# Altium PCB Revision-1.PcbDoc
Units mil, origin at the board's own origin, x right, y up, seen from the top; angles counter-clockwise.
Board outline 3513.78 x 1830.71 mil, 2 copper layers (Top Layer, Bottom Layer); 68 components, 46 nets, 254 pads, 43 vias.
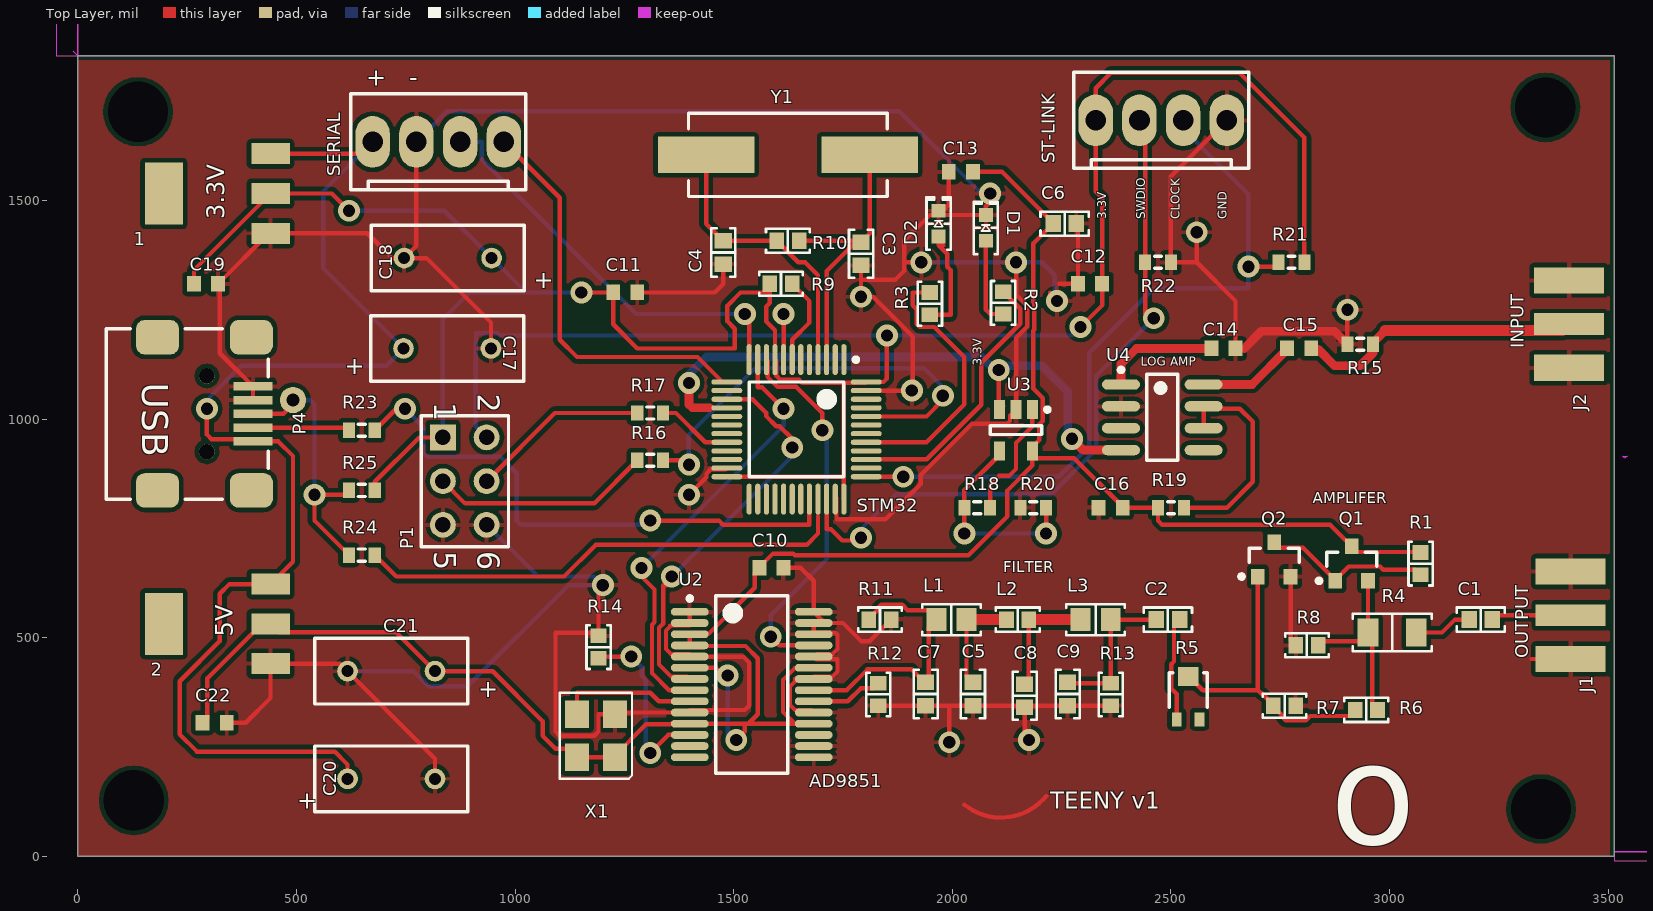
[diagram p0: Top Layer view]
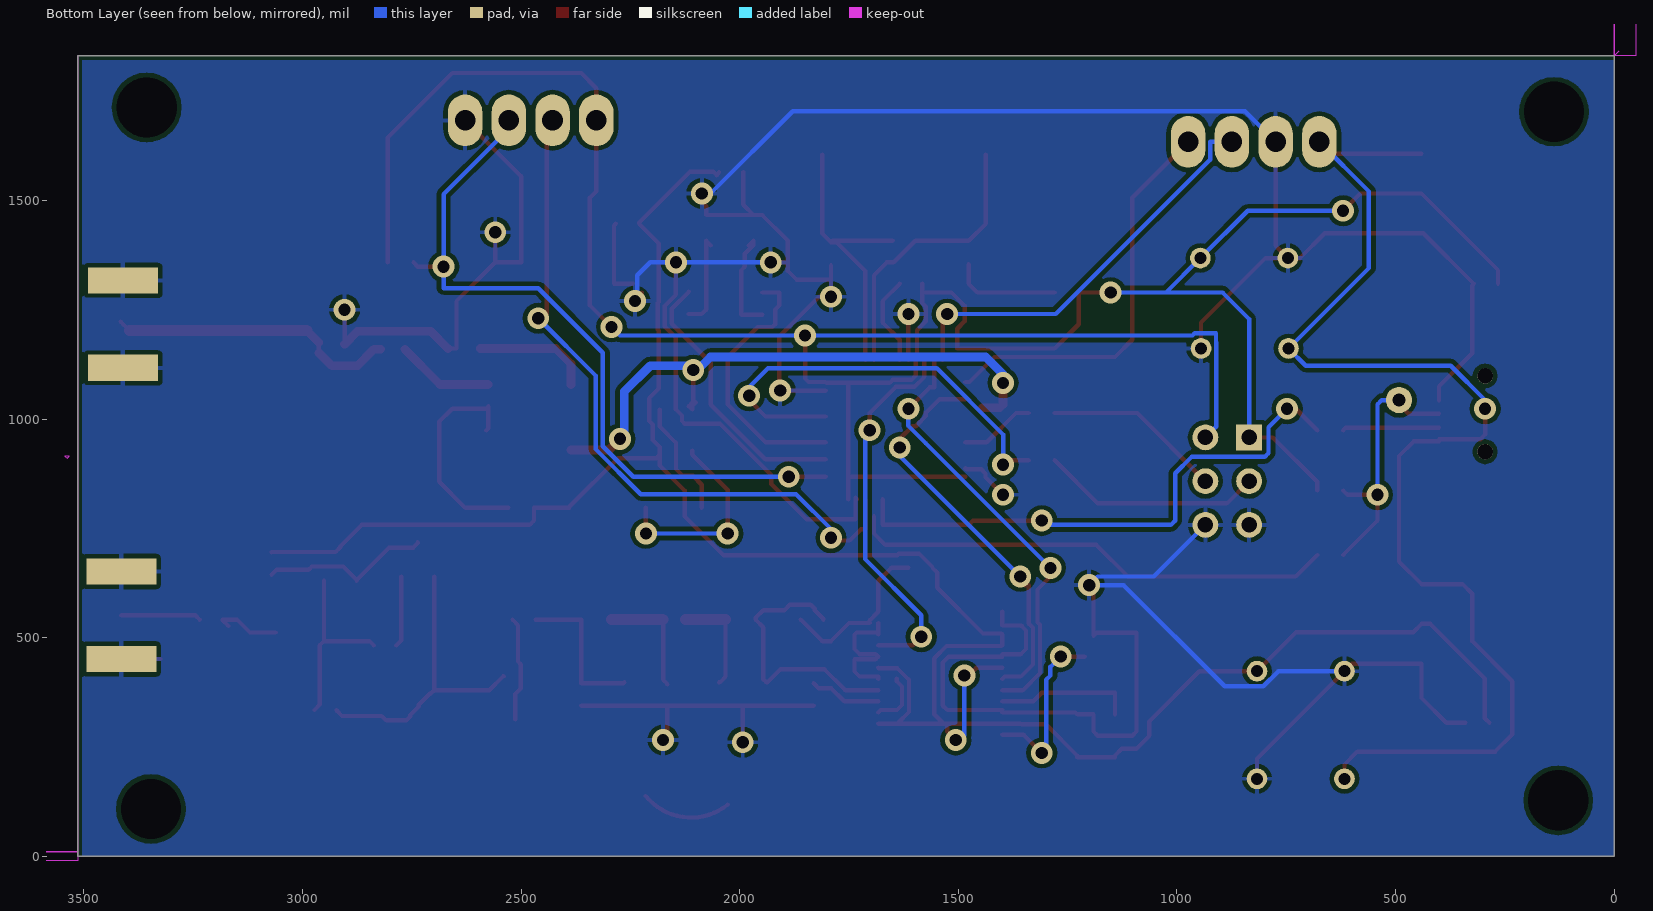
[diagram p1: Bottom Layer view, seen from below]

## Layer stack, top to bottom
Top Solder: solder mask 0.4, Solder Resist, Dk 3.5
Top Layer: signal copper 1.4
Dielectric 1: dielectric 12.6, FR-4, Dk 4.8
Bottom Layer: signal copper 1.4
Bottom Solder: solder mask 0.4, Solder Resist, Dk 3.5

## Board outline
0,0 0,816.93 0,1210.63 0,1830.71 3513.78,1830.71 3513.78,0
cut-out: 0,1830.71 0,3996.06 -49.21,3996.06 -49.21,1830.71
cut-out: 3513.78,-9.84 5984.25,-9.84 5994.09,0 5994.09,9.84 3513.78,9.84
cut-out: 0,1830.71 3513.78,1830.71 3513.78,9.84 5994.09,9.84 5994.09,4005.91 0,4005.91 0,1830.71 -9.84,1840.55
cut-out: 3533.46,915.35 3543.31,915.35 3538.39,910.43

## Design rules (kind name [scope] priority, off if disabled: settings)
Clearance [All] p1: gap=10 ignorepadtopadclearanceinfootprint=TRUE except(0: Arc-Hole Track-Hole SMDPad-Hole THPad-Hole Via-Hole Fill-Hole Poly-Hole Region-Hole Text-Hole; 6: Arc-Arc Arc-Track Arc-SMDPad Arc-THPad Track-Track Track-SMDPad Track-THPad SMDPad-SMDPad SMDPad-THPad; 7: Arc-Via Track-Via)
PolygonConnect [All] p1: connectstyle=Relief reliefconductorwidth=10 reliefentries=4 polygonreliefangle="90 Angle" airgapwidth=10
RoutingVias [All] p1: holewidth=28 width=50 viastyle="Through Hole" minholewidth=28 minwidth=50 maxholewidth=28 maxwidth=50
SolderMaskExpansion [All] p1 off: expansion=4
Width [All] p1: maxlimit=30 minlimit=10 preferedwidth=10
30 further rules are at their usual default settings.

## Classes and differential pairs
component class Sheet1: C1 C2 C3 C4 C5 C6 C7 C8 C9 C10 C11 C12 C13 C14 C15 C16 D1 D2 L1 L2 L3 LED Q1 Q2 R1 R2 R3 R4 R5 R6 R7 R8 R9 R10 R11 R12 R13 R14 R15 R16 R17 R18 R19 R20 STM32 U2 U3 U4 X1 Y1
component class Power: 1 2 C17 C18 C19 C20 C21 C22 J1 J2 P4 R21 R22 R23 R24 R25 SERIAL ST-LINK

## Components (designator, comment, footprint, x,y, rotation, side; value= is the part's Value field where it differs from the comment)
1 "AMS1117-3.3" SOT223 318.86,1515.75 r180 top
2 "AMS1117-5.0" SOT223 318.86,531.5 r180 top
C1 "Cap Semi" "CAP 0603/1608" 3208.66,541.34 r0 top value=10uF
C2 "Cap Semi" "CAP 0603/1608" 2493.11,541.34 r180 top value=10uF
C3 "Cap Semi" "CAP 0603/1608" 1791.34,1377.95 r270 top value=22pF
C4 "Cap Semi" "CAP 0603/1608" 1476.38,1380.9 r270 top value=22pF
C5 "Cap Semi" "CAP 0603/1608" 2047.24,371.06 r90 top value=81pF
C6 "Cap Semi" "CAP 0603/1608" 2256.89,1446.85 r180 top value=100nF
C7 "Cap Semi" "CAP 0603/1608" 1938.98,371.06 r90 top value=20pF
C8 "Cap Semi" "CAP 0603/1608" 2165.35,367.12 r90 top value=81pF
C9 "Cap Semi" "CAP 0603/1608" 2263.78,371.06 r90 top value=20pF
C10 "Cap Semi" 1608[0603] 1586.61,659.45 r180 top value=100nF
C11 "Cap Semi" 1608[0603] 1251.97,1289.37 r180 top value=100nF
C12 "Cap Semi" 1608[0603] 2314.96,1309.05 r0 top value=100nF
C13 "Cap Semi" 1608[0603] 2019.68,1564.96 r0 top value=100nF
C14 "Cap Semi" 1608[0603] 2620.08,1161.42 r0 top value=10uF
C15 "Cap Semi" 1608[0603] 2793.31,1161.42 r0 top value=10uF
C16 "Cap Semi" 1608[0603] 2362.2,797.24 r0 top value=100pF
C17 "Cap Pol1" RAD-0.2 844.88,1161.42 r0 top value=10uF
C18 "Cap Pol1" RAD-0.2 846.46,1368.11 r180 top value=10uF
C19 "Cap Semi" 1608[0603] 293.31,1309.05 r180 top value=100nF
C20 "Cap Pol1" RAD-0.2 716.93,177.17 r0 top value=10uF
C21 "Cap Pol1" RAD-0.2 716.93,423.23 r180 top value=10uF
C22 "Cap Semi" 1608[0603] 312.99,305.12 r180 top value=100nF
D1 "RED" "LED 0603/1608 RED" 2076.77,1437.01 r90 top
D2 "GREEN" "LED 0603/1608 GREEN" 1968.5,1446.85 r90 top
J1 "1865" ADAFRUIT_1865_1865(Primary) 3494.09,551.18 r180 top
J2 "1865" ADAFRUIT_1865_1865(Primary) 3490.35,1217.05 r180 top
L1 "Inductor" "RES 0805/2012" 1998.03,541.34 r0 top value=150nH
L2 "Inductor" "RES 0603/1608" 2149.61,541.34 r0 top value=120nH
L3 "Inductor" "RES 0805/2012" 2327.76,541.34 r0 top value=150nH
P1 "Header 3X2" HDR2X3 835.04,957.87 r270 top
P4 "USB" "FCI USB 10033526-N3212LF" 249.96,1011.81 r90 top
Q1 "MMBT3904LT1G" ONSC-SOT-23-3-318-08_V 2913.39,669.29 r90 top
Q2 "MMBT3904LT1G" ONSC-SOT-23-3-318-08_V 2736.22,679.13 r90 top
R1 "Res3" "RES 0603/1608" 3070.87,669.29 r90 top value=220
R2 "Res3" "RES 0603/1608" 2116.14,1265.75 r90 top value=220
R3 "Res3" "RES 0603/1608" 1948.82,1263.78 r90 top value=220
R4 "Res3" "RES 1206/3216" 3005.91,511.81 r180 top value=4.7K
R5 "Res Adj2" "POT BOURNS TRIMPOT 3302" 2539.37,364.17 r0 top value=1K
R6 "Res3" "RES 0603/1608" 2946.85,334.65 r180 top value=220
R7 "Res3" "RES 0603/1608" 2759.84,344.49 r180 top value=100
R8 "Res3" "RES 0603/1608" 2811.02,482.28 r0 top value=220
R9 "Res3" "RES 0603/1608" 1608.27,1309.06 r0 top value=10K
R10 "Res3" "RES 0603/1608" 1624.02,1407.48 r0 top value=1M
R11 "Res3" "RES 0603/1608" 1834.65,541.34 r180 top value=100
R12 "Res3" "RES 0603/1608" 1830.71,370.08 r90 top value=51
R13 "Res3" "RES 0603/1608" 2362.2,370.08 r90 top value=100
R14 "Res3" "RES 0603/1608" 1190.95,478.35 r270 top value=3.9K
R15 "Res3" J1-0603 2933.07,1171.26 r0 top value=51
R16 "Res3" J1-0603 1309.06,905.51 r0 top value=10K
R17 "Res3" J1-0603 1309.06,1013.78 r180 top value=10K
R18 "Res3" J1-0603 2057.09,797.25 r180 top value=1K
R19 "Res3" J1-0603 2500,797.24 r0 top value=4.7
R20 "Res3" J1-0603 2185.04,797.24 r180 top value=1K
R21 "Res3" J1-0603 2775.59,1358.27 r0 top value=10K
R22 "Res3" J1-0603 2470.47,1358.27 r180 top value=10K
R23 "Res3" J1-0603 649.61,974.41 r0 top value=22
R24 "Res3" J1-0603 649.61,688.98 r0 top value=22
R25 "Res3" J1-0603 649.61,836.61 r0 top value=1.5K
SERIAL "BACKUP" "MOLEX KK 0022272041" 824.41,1633.86 r0 top (schematic designator P2)
ST-LINK "ST-Link" "MOLEX KK 0022272041" 2477.95,1683.07 r0 top (schematic designator P3)
STM32 "STM32F103C8T6" STM-LQFP48_N 1643.7,976.38 r270 top (schematic designator U1)
U2 "AD9851BRSRL" ADI-RS-28_M 1541.34,392.72 r0 top
U3 "LM7301IM5" MF05A_N 2145.67,974.41 r270 top
U4 "AD8307ARZ" ADI-R-8_N 2480.32,1003.94 r0 top
X1 "KC5032A30" KC5032A30 1185.04,275.59 r90 top
Y1 "XTAL" "ABRACON ABLS" 1624.02,1604.33 r0 top

## Footprints (in the part's own frame and the unit in brackets; to place one, negate y for a bottom-side part, rotate by r counter-clockwise, add the part's x,y. Pads: shape width x height; smd on the part's side, far side on the other; paste and mask are expansions set on the pad)
1608[0603] [mm] "Chip Capacitor, Body 1.6x0.8mm, IPC High Density"
  rect 0.8x0.9 smd: 1(-0.7,0) 2(0.7,0)
  body extent -0.87,-0.48 0.87,0.48, height 1.3
"ABRACON ABLS" [mm] "Crystal, 2-Leads, Body 4.70x11.40mm, Pitch 8.80mm, IPC Medium Density"
  rect 5.6x2.1 smd: 1(-4.75,0) 2(4.75,0)
  silkscreen extent -5.77,-2.43 5.77,2.43, body extent -6.35,-2.35 6.35,2.35, height 4.2
ADAFRUIT_1865_1865(Primary) [mil]
  rect 160x60 smd: GND1(80,100) GND4(80,-100)
  rect 160x60 smd far side: GND2(80,100) GND3(80,-100)
  rect 160x50 smd: P(80,0)
ADI-R-8_N [mm] "SOIC, 8-Leads, Body 4.9x3.9mm, Pitch 1.27mm, IPC Medium Density"
  oval 2.2x0.6 smd: 1(-2.4,1.905) 2(-2.4,0.635) 3(-2.4,-0.635) 4(-2.4,-1.905) 5(2.4,-1.905) 6(2.4,-0.635) 7(2.4,0.635) 8(2.4,1.905)
  silkscreen extent -2.52,-2.5 0.9,2.88, body extent -2,-2.5 2,2.5, height 1.75
ADI-RS-28_M [mm] "SOP, 28-Leads, Body 10.2x5.3mm, Pitch 0.65mm, IPC Low Density"
  oval 2.2x0.45 smd: 1(-3.6,4.225) 2(-3.6,3.575) 3(-3.6,2.925) 4(-3.6,2.275) 5(-3.6,1.625) 6(-3.6,0.975) 7(-3.6,0.325) 8(-3.6,-0.325) 9(-3.6,-0.975) 10(-3.6,-1.625) 11(-3.6,-2.275) 12(-3.6,-2.925) 13(-3.6,-3.575) 14(-3.6,-4.225) 15(3.6,-4.225) 16(3.6,-3.575) 17(3.6,-2.925) 18(3.6,-2.275) 19(3.6,-1.625) 20(3.6,-0.975) 21(3.6,-0.325) 22(3.6,0.325) 23(3.6,0.975) 24(3.6,1.625) 25(3.6,2.275) 26(3.6,2.925) 27(3.6,3.575) 28(3.6,4.225)
  silkscreen extent -3.72,-5.15 2.1,5.15, body extent -2.69,-5.17 2.69,5.17, height 1.98
"CAP 0603/1608" [mm] "Chip Capacitor, 2-Leads, Body 1.60x0.80mm, IPC Medium Density"
  rect 0.9x1 smd: 1(-0.675,0) 2(0.675,0)
  silkscreen extent -1.4,-0.7 1.4,0.7, body extent -0.8,-0.41 0.8,0.41, height 0.82
"FCI USB 10033526-N3212LF" [mm] "USB 2.0 Type B Mini"
  rect 0.5x2.25 smd: 1(1.6,-3.826) 2(0.8,-3.826) 3(0,-3.826) 4(-0.8,-3.826) 5(-1.6,-3.826)
  round 0.9 hole 0.9 unplated: M(-2.2,-1.151) M(2.2,-1.151)
  rrect50% 2x2.5 smd: S(-4.45,-3.731) S(-4.45,1.719) S(4.45,-3.731) S(4.45,1.719)
  silkscreen extent -4.95,-4.71 4.95,4.69, body extent -4.95,-4.7 4.95,4.7, height 4.01
HDR2X3 [mm] "Connector; Header; 3x2 Position"
  rect 1.5x1.5 hole 0.9: 1(0,0)
  round 1.5 hole 0.9: 2(0,2.54) 3(2.54,0) 4(2.54,2.54) 5(5.08,0) 6(5.08,2.54)
  silkscreen extent -1.27,-1.27 6.35,3.81
J1-0603 [mm] "Chip Resistor, Body 1.6x0.8mm, IPC High Density"
  rect 0.7x0.9 smd: 1(-0.75,0) 2(0.75,0)
  silkscreen extent -0.2,-0.35 0.2,0.35, body extent -0.85,-0.48 0.85,0.48, height 0.9
KC5032A30 [mm] "Standard Clock Oscillators 30.0000MHZ"
  rect 1.6x1.4 smd: 1(-1.25,-1.1) 2(1.25,-1.1) 3(1.25,1.1) 4(-1.25,1.1)
  silkscreen extent -2.5,-2.1 2.5,2.1
"LED 0603/1608 GREEN" [mm] "Chip Diode, 2-Leads, Body 1.60x0.80mm, IPC Medium Density"
  rect 0.8x0.8 smd: 1(-0.75,0) 2(0.75,0)
  silkscreen extent -1.52,-0.7 1.52,0.7, body extent -0.8,-0.4 0.8,0.4, height 0.53
"LED 0603/1608 RED" [mm] "Chip Diode, 2-Leads, Body 1.60x0.80mm, IPC Medium Density"
  rect 0.8x0.8 smd: 1(-0.75,0) 2(0.75,0)
  silkscreen extent -1.52,-0.7 1.52,0.7, body extent -0.8,-0.4 0.8,0.4, height 0.53
MF05A_N [mm] "SOT23, 5-Leads, Body 2.9x1.6mm, Pitch 0.95mm, Lead Span 2.8mm, IPC Medium Density"
  rect 1.1x0.65 smd: 1(-1.2,0.95) 2(-1.2,0) 3(-1.2,-0.95) 4(1.2,-0.95) 5(1.2,0.95)
  silkscreen extent -1.32,-1.5 0.25,1.95, body extent -0.83,-1.49 0.83,1.5, height 1.19
"MOLEX KK 0022272041" [mm]
  oval 2x3 hole 1.2: 1(-3.81,0) 2(-1.27,0) 3(1.27,0) 4(3.81,0)
  silkscreen extent -5.08,-2.79 5.08,2.79, body extent -5.08,-2.9 5.08,2.9, height 11.7
ONSC-SOT-23-3-318-08_V [mm] "SOT23, 3-Leads, Body 2.92x1.3mm, Pitch 0.95mm"
  rect 0.9x0.8 smd: 1(-1,0.95) 2(-1,-0.95) 3(1,0)
  silkscreen extent -1.12,-1.46 0.65,2.02, body extent -0.65,-1.46 0.65,1.46, height 1.11
"POT BOURNS TRIMPOT 3302" [mm] "Bourns Trimpot 3302 - Open Frame 2.75mm x 2.20mm x 1.05mm"
  rect 0.575x0.8 smd: 1(-0.663,-1.3) 3(0.663,-1.3)
  rect 1.2x1.1 smd: 2(0,1.2)
  silkscreen extent -1.1,-0.6 1.1,1.4, body extent -1.1,-1.3 1.1,1.45, height 0.81
RAD-0.2 [mm] "Radial Cap, Thru-Hole; 2 Leads; 0.2 in Pin Spacing"
  round 1.2 hole 0.7: 1(-2.54,0) 2(2.54,0)
  silkscreen extent -4.45,-1.91 4.44,1.9
"RES 0603/1608" [mm] "Chip Resistor, 2-Leads, Body 1.60x0.80mm, IPC Medium Density"
  rect 0.85x0.95 smd: 1(-0.65,0) 2(0.65,0)
  silkscreen extent -1.27,-0.7 1.27,0.7, body extent -0.8,-0.4 0.8,0.4, height 0.45
"RES 0805/2012" [mm] "Chip Resistor, 2-Leads, Body 2.00x1.25mm, IPC Medium Density"
  rect 1.15x1.35 smd: 1(-0.875,0) 2(0.875,0)
  silkscreen extent -1.7,-0.9 1.7,0.9, body extent -0.95,-0.62 1.05,0.63, height 0.6
"RES 1206/3216" [mm] "Chip Resistor, 2-Leads, Body 3.13x1.55mm, IPC Medium Density"
  rect 1.2x1.65 smd: 1(-1.4,0) 2(1.4,0)
  silkscreen extent -2.3,-1.1 2.3,1.1, body extent -1.57,-0.8 1.62,0.8, height 0.6
SOT223 [mil]
  rect 88x48 smd: 1(-122,91) 2(-122,0) 3(-122,-91)
  rect 86.61x141.73 smd: 4(122.01,0)
STM-LQFP48_N [mm] "QFP, 48-Leads, Body 7x7mm, Pitch 0.5mm, IPC Medium Density"
  oval 1.8x0.3 smd: 1(-4.05,2.75) 2(-4.05,2.25) 3(-4.05,1.75) 4(-4.05,1.25) 5(-4.05,0.75) 6(-4.05,0.25) 7(-4.05,-0.25) 8(-4.05,-0.75) 9(-4.05,-1.25) 10(-4.05,-1.75) 11(-4.05,-2.25) 12(-4.05,-2.75) 25(4.05,-2.75) 26(4.05,-2.25) 27(4.05,-1.75) 28(4.05,-1.25) 29(4.05,-0.75) 30(4.05,-0.25) 31(4.05,0.25) 32(4.05,0.75) 33(4.05,1.25) 34(4.05,1.75) 35(4.05,2.25) 36(4.05,2.75)
  oval 0.3x1.8 smd: 13(-2.75,-4.05) 14(-2.25,-4.05) 15(-1.75,-4.05) 16(-1.25,-4.05) 17(-0.75,-4.05) 18(-0.25,-4.05) 19(0.25,-4.05) 20(0.75,-4.05) 21(1.25,-4.05) 22(1.75,-4.05) 23(2.25,-4.05) 24(2.75,-4.05) 37(2.75,4.05) 38(2.25,4.05) 39(1.75,4.05) 40(1.25,4.05) 41(0.75,4.05) 42(0.25,4.05) 43(-0.25,4.05) 44(-0.75,4.05) 45(-1.25,4.05) 46(-1.75,4.05) 47(-2.25,4.05) 48(-2.75,4.05)
  silkscreen extent -4.17,-2.75 2.75,3.58, body extent -3.5,-3.5 3.5,3.5, height 1.6

## Part data
1: library part AMS1117-5.0, "Sot-223", Package="SOT-223 ams", Availability=Unavailable, MF=ams, MP=AMS1117-5.0, Price="0.10 USD"
2: "Sot-223", Package="SOT-223 ams", Availability=Unavailable, MF=ams, MP=AMS1117-5.0, Price="0.10 USD"
C1 C2 C3 C4 C5 C6 C7 C8 C9 C10 C11 C12 C13 C14 C15 C16 C19 C22: "Capacitor (Semiconductor SIM Model)", LatestRevisionDate=29-May-2009, LatestRevisionNote="IPC-7351 Footprint Added.", PackageDescription="Chip Capacitor", PackageReference=C1206, Published=8-Jun-2000, Publisher="Altium Limited"
C17 C18 C20 C21: "Polarized Capacitor (Radial)", LatestRevisionDate=17-Jul-2002, LatestRevisionNote="Re-released for DXP Platform.", PackageDescription="Polarized Capacitor (Radial); 2 Leads", PackageReference=RB7.6-15, Published=8-Jun-2000, Publisher="Altium Limited"
D1 D2: library part LED3, "Typical BLUE SiC LED", DatasheetVersion=16-Apr-2002, LatestRevisionDate=17-Dec-2003, LatestRevisionNote="PCB Footprint replaced.", PackageDescription="SM LED; 2 C-Bend Leads; Body 3.5 x 2.8 x 1.9 mm, inc leads (LxWxH typ)", PackageReference=3.5X2.8X1.9, PackageVersion=16-Apr-2002, Published=8-Jun-2000, Publisher="Altium Limited"
J1 J2: "ROUND STANDOFF 4-40 BRASS 5/8", Package=None, Availability=Bad, MF=Keystone, MP=1865, Price="2.41 USD"
P1: "Header, 3-Pin, Dual row", LatestRevisionDate=17-Jul-2002, LatestRevisionNote="Re-released for DXP Platform.", Publisher="Altium Limited"
P4: library part "Header 5", "Header, 5-Pin", LatestRevisionDate=17-Jul-2002, LatestRevisionNote="Re-released for DXP Platform.", Publisher="Altium Limited"
Q1 Q2: "General Purpose Transistor, NPN Silicon, 3-Pin SOT-23, Pb-Free, Tape and Reel", Manufacturer="On Semiconductor", Supplier Part Number 1=MMBT3904LT1GOSTR-ND, Supplier Part Number 10=863-MMBT3904LT1G, ComponentLink1Description="Manufacturer URL", ComponentLink1URL=http://www.onsemi.com/, ComponentLink2Description=Datasheet, ComponentLink2URL=http://www.onsemi.cn/pub_link/Collateral/MMBT3904LT1-D.PDF, ComponentLink3Description="Package Specification", ComponentLink3URL=http://www.onsemi.cn/pub_link/Collateral/318-08.PDF, DatasheetVersion="Rev. 12", fT Min (MHz)=300, IC Continuous (A)=0.2, Mounting Technology="Surface Mount", PackageDescription="3-Pin Small Outline Transistor, Body 2.92 x 1.3 mm, Pitch 0.95 mm", PackageReference=SOT-23-3-318-08, PackageVersion="Rev. AP, 11/2009", Packing="Tape and Reel", PartNumber=MMBT3904LT1G, Polarity=NPN, RoHS=TRUE, Supplier 1=Digi-Key, Supplier 2=Digi-Key, Supplier 3=Digi-Key, Supplier 4=Farnell, Supplier 5=Farnell, Supplier 6=Farnell, Supplier 7=Newark, Supplier 8=Newark, Supplier 9=Newark, Supplier 10=Mouser, Supplier Part Number 2=MMBT3904LT1GOSCT-ND, Supplier Part Number 3=MMBT3904LT1GOSDKR-ND, Supplier Part Number 4=2317804, Supplier Part Number 5=1459100, Supplier Part Number 6=1459100RL, Supplier Part Number 7=83K0942, Supplier Part Number 8=83H7337, Supplier Part Number 9=28X7922
R1 R2 R3 R4 R6 R7 R8 R9 R10 R11 R12 R13 R14 R15 R16 R17 R18 R19 R20 R21 R22 R23 R24 R25: "Resistor", LatestRevisionDate=29-May-2009, LatestRevisionNote="IPC-7351 Footprint Added.", PackageDescription="Chip Resistor", PackageReference=J1-0603, Published=8-Jun-2000, Publisher="Altium Limited"
R5: "Variable Resistor", LatestRevisionDate=17-Jul-2002, LatestRevisionNote="Re-released for DXP Platform.", PackageDescription="Axial Device, Thru-Hole; 2 Leads; 0.6 in Pin Spacing", PackageReference=AXIAL-0.6, Published=8-Jun-2000, Publisher="Altium Limited", Set Position=0.5
SERIAL ST-LINK: library part "Header 4", "Header, 4-Pin", LatestRevisionDate=17-Jul-2002, LatestRevisionNote="Re-released for DXP Platform.", Publisher="Altium Limited"
STM32: "ARM Cortex-M3 32-bit MCU, 64 KB Flash, 20 KB Internal RAM, 37 I/Os, 48-pin LQFP, -40 to 85 degC, Tray", I/Os (High Current)=37, Operating Frequency(F) (Processor speed) (MHz)=72, Supplier Part Number 1=497-6063-ND, Supply Voltage(Vcc) min (V)=2, A/D Converter="2x12-bit (10 Channel)", ComponentLink1Description="Manufacturer URL", ComponentLink1URL=http://www.st.com/web/en/home.html, ComponentLink2Description=Datasheet, ComponentLink2URL=http://www.st.com/st-web-ui/static/active/en/resource/technical/document/datasheet/CD00161566.pdf, ComponentLink3Description="Package Specification", ComponentLink3URL=http://www.st.com/st-web-ui/static/active/en/resource/technical/document/datasheet/DM00058181.pdf, Core="ARM Cortex-M3", DatasheetVersion="Rev. 16", FLASH Size (Prog) (kB)=64, Internal RAM Size (kB)=20, Mounting Technology="Surface Mount", PackageDescription="48-Pin Low Profile Quad Flat Package, 7 x 7 mm Body, 0.5 mm Pitch", PackageReference=LQFP48, PackageVersion="Rev. 6, 06/2013", Packing=Tray, PartNumber=STM32F103C8T6, Supplier 1=Digi-Key, Supplier 2=Farnell, Supplier 3=Newark, Supplier 4=Newark, Supplier 5=Mouser, Supplier Part Number 2=1447637, Supplier Part Number 3=59M2182, Supplier Part Number 4=57P1222, Supplier Part Number 5=511-STM32F103C8T6
U2: "CMOS 180 MHz DDS/DAC Synthesizer, 10-Bit, Parallel, Serial, RS-28, 1500 Reel,Pb-Free", Code_JEDEC=MO-150-AH, Compliance Range (V)=1.5V, ComponentLink1Description="Manufacturer URL", ComponentLink1URL=www.analog.com, ComponentLink2Description=Datasheet, ComponentLink2URL=http://www.analog.com/static/imported-files/data_sheets/AD9851.pdf, ComponentLink3Description="Package Specification", ComponentLink3URL=http://www.analog.com/static/imported-files/packages/32122249223724RS_28.pdf, DatasheetVersion="Rev. D", FS Iout (mA nom)=20mA, I/O Interface="Parallel, Serial", I Supply total (max)=130mA, Master fclk=180MHz, PackageDescription="28-Lead Shrink Small Outline Package [SSOP]", PackageReference=RS-28, PackageVersion="revA, 1997", REFCLK Multiplier=Yes, Resolution (Bits)=10bit, Tuning Word Width (bits)=32bit
U3: "Low Power, 4 MHz GBW, Rail-to-Rail Input-Output Operational Amplifier, 5-pin SOT-23", Manufacturer="National Semiconductor", PackageTopMarking=A04A*XTT, PowerWise=N, ComponentLink1Description="Manufacturer URL", ComponentLink1URL=http://www.national.com/, ComponentLink2Description="LM7301 Datasheet", ComponentLink2URL=http://www.national.com/ds/LM/LM7301.pdf, ComponentLink3Description="LM7301 Web Page", ComponentLink3URL=http://www.national.com/pf/LM/LM7301.html, ComponentLink4Description="MF05A Package Page", ComponentLink4URL=http://www.national.com/packaging/folders/mf05a.html, CompType=Amplifiers, DatasheetVersion=May-2009, High-Reliability=Y, PackageDescription="Molded SOT-23, .115 x .063 x .040 in Body, 5 Lead, .0375 in Pitch", PackageReference=MF05A, PackageVersion="revD, Aug-2008", PartNumber=LM7301IM5, PinCount=5, RoHS=N
U4: "Low Cost, DC to 500 MHz, 92 dB Logarithmic Amplifier, 400ns Response Time, R-8, Pb-Free, 98 Tube", RF Frequency (MHz)="dc to 500", Supply Current=8mA, Temp Stability (dB)=1dB, Voltage Supply (V)="2.7 to 5.5", Code_JEDEC=MS-012-AA, ComponentLink1Description="Manufacturer URL", ComponentLink1URL=www.analog.com, ComponentLink2Description=Datasheet, ComponentLink2URL=http://www.analog.com/static/imported-files/data_sheets/AD8307.pdf, ComponentLink3Description="Package Specification", ComponentLink3URL=http://www.analog.com/static/imported-files/packages/PKG_PDF/SOIC_Narrow%20(R)/R_8.pdf, DatasheetVersion="Rev. D", Dynamic Range (dB)=92dB, PackageDescription="8-Lead Standard Small Outline Package [SOIC_N]", PackageReference=R-8, PackageVersion=060506-A, Product Description="High Dynamic Range", Response Time (ns typ)=400ns
X1: "Standard Clock Oscillators 30.0000MHZ", Mfr1="AVX / Kyocera", Mfr PN=KC5032A30
Y1: "Crystal Oscillator", LatestRevisionDate=17-Jul-2002, LatestRevisionNote="Re-released for DXP Platform.", PackageDescription="Crystal, Thru-Hole; 2 Leads; Body 3.1 x 8.2 mm (Dia.xH)", PackageReference=R38, Published=8-Jun-2000, Publisher="Altium Limited"
L1 L2 L3: Code_IEC=1005, Code_JEITA=0402, LatestRevisionDate=29-May-2009, LatestRevisionNote="IPC-7351 Footprint Added.", PackageDescription="Chip Inductor", PackageReference=0402-A, Published=8-Jun-2000, Publisher="Altium Limited"

## Free pads (board coordinates)
  round 60 hole 30: 3(492.13,1043.31)
  round 60 hole 137.8 unplated: 4(127.95,127.95)
  round 60 hole 137.8: 5(137.8,1702.76) 6(3346.46,108.27) 7(3356.3,1712.6)

## Via types
v1: diameter 50, hole 28, Top Layer to Bottom Layer, tented both sides, 43 vias

## Nets (pads, with @x,y where several pads share a name; then routed paths per layer and width w, separated by ;. In a path a pad name is that pad's centre, name@x,y a point inside that pad or via, vN(x,y) a via of type N, cw(c..) or ccw(c..) an arc to the next point about the centre after c; other vN are vias at no path point)
3.3V: 1.2 C11.2 C12.2 C18.1 C19.2 P1.1 P1.2 R9.1 R21.2 R25.2 ST-LINK.1 STM32.9 STM32.24 STM32.36 STM32.48 | length 6610.7
  Top Layer w10: C19.2 265.75,1340.64 1.2 580.71,1515.75 v1(620.08,1476.38) ; R25.2 679.13,856.3 780.71,957.87 P1.1 ; v1@1161.42,1289.37 C11.2 1224.41,1216.54 1279.53,1161.42 1502.69,1161.42 1502.69,1206.48 1485.59,1223.59 1485.59,1259.21 1515.75,1289.37 1582.68,1289.37 ; STM32.24 1750,868.11 1751.97,866.14 ; R9.1 1582.68,1289.37 ; STM32.36 1751.97,866.14 ; v1(1850.39,1190.94) 1850.39,1092.52 1842.52,1084.64 STM32.48 1801.18,1082.68 1751.97,1082.68 ; v1(2293.31,1210.63) 2342.52,1259.84 C12.2 2342.52,1505.91 2327.95,1520.47 ST-LINK.1 2327.95,1756.69 2362.6,1791.34 2657.48,1791.34 2805.12,1643.7 R21.2 ; 1582.68,1289.37 1582.68,1265.23 1574.17,1256.73 1574.17,1223.59 1594.49,1203.27 STM32.9 1597.27,1133.05 1597.27,1099.3 1607.17,1089.39 1649.77,1089.39 1656.49,1082.68 1751.97,1082.68 ; 1751.97,866.14 1751.97,1082.68
  Bottom Layer w10: v1(620.08,1476.38) 838.19,1476.38 C18.1 1025.2,1289.37 ; P1.1 835.04,1228.74 895.67,1289.37 1025.2,1289.37 ; P1.2 910.26,982.65 910.26,1175.76 910.61,1176.11 910.61,1196.04 959.22,1196.04 964.32,1190.94 v1(1850.39,1190.94) 2273.62,1190.94 v1(2293.31,1210.63) ; v1(1151.57,1289.37) 1025.2,1289.37
5V: 2.2 C6.2 C10.2 C13.2 C16.2 C21.1 C22.2 Q1.3 R1.2 R19.1 U2.3 U2.4 U2.6 U2.11 U2.18 U2.23 U3.5 X1.1 X1.4 | length 5408
  Top Layer w10: C22.2 296.18,315.87 296.18,406.82 420.86,531.5 2.2 459.86,512.5 727.66,512.5 C21.1 948.82,423.23 1062.99,309.06 1062.99,275.59 1092.52,246.06 1125.99,246.06 1141.73,230.32 X1.4 X1.1 1228.35,230.32 1299.71,301.67 1356.3,301.67 ; U2.11@1357.01,303.15 U2.11 1525.59,303.15 ; U2.6 1458.66,431.1 1476.38,413.39 v1(1486.22,413.39) ; v1(1505.91,265.75) 1525.59,285.43 1525.59,303.15 ; U2.18 1639.71,303.15 ; U2.23 1681.59,429.63 1638.99,429.63 1612.76,403.4 1612.76,330.1 1639.71,303.15 ; C13.2 2047.24,1562.99 2052.43,1557.81 2060.2,1565.59 2113.54,1565.59 2230.32,1448.82 C6.2 2185.04,1401.58 2185.04,1267.69 2187.51,1265.22 2187.51,1204.73 2185.04,1202.26 2185.04,1069.7 2206.87,1047.87 2206.87,995.45 2199.07,987.65 2199.07,952.03 2183.07,936.03 U3.5 U3.5@2183.07,918.31 ; R1.2 3069.8,695.95 2924.13,695.95 2913.39,706.69 Q1.3 2864.17,757.87 2480.32,757.87 2470.47,767.72 R19.1 C16.2 2389.77,799.21 2278.46,910.51 2190.87,910.51 U3.5@2183.07,918.31 ; 1525.59,303.15 1533.47,303.15 ; 1533.47,303.15 1639.71,303.15 ; 1533.47,303.15 1555.12,324.8 1555.12,452.76 1527.07,480.81 1401.08,480.81 U2.4 U2.3 1401.08,509.35 1443.68,509.35 1548.31,613.98 1548.31,648.7 C10.2 1559.06,661.42 1589.8,692.17 1636.13,692.17 1639.95,688.34 2036.77,688.34 2125.98,777.56 2125.98,836.61 2183.07,893.7 U3.5@2183.07,918.31
  Bottom Layer w10: v1(1486.22,413.39) 1486.22,275.59 1496.06,265.75 v1(1505.91,265.75)
A5: R18.1 U3.1 | length 277.9
  Top Layer w10: R18.1 2086.61,849.85 2106.73,869.97 2129.81,869.97 2145.67,885.83 2145.67,945.43 2183.07,982.83 U3.1
BOOT0: R16.2 STM32.44 | length 1011.8
  Top Layer w10: R16.2 1387.8,905.51 v1(1397.64,895.67) ; STM32.44 1940.94,1005.91 v1@1978.35,1043.31
  Bottom Layer w10: v1(1397.64,895.67) 1397.64,964.57 1548.96,1115.89 1935.29,1115.89 1988.19,1062.99 v1(1978.35,1053.15)
BOOT1: R17.1 STM32.20 | length 173.4
  Top Layer w10: R17.1 1368.11,1013.78 1435.04,946.85 STM32.20
ClOCK: STM32.15 U2.7 | length 913.5
  Top Layer w10: v1@1358.27,629.92 1348.43,620.08 1338.58,620.08 1338.58,532.01 1329.3,522.73 1329.3,438.88 1356.93,411.24 1393.87,411.24 U2.7 ; STM32.15 1543.31,1045.28 1574.17,1014.41 1574.17,1007.05 1597.6,983.62 1604.96,983.62 1633.86,954.72 v1(1633.86,935.04)
  Bottom Layer w10: v1(1358.27,639.76) 1633.86,915.35 v1(1633.86,935.04)
DATA: STM32.10 U2.25 | length 889.1
  Top Layer w10: STM32.10 1577.58,1133.05 1577.58,1096.35 1600.54,1073.39 1643.14,1073.39 1702.76,1013.78 v1(1702.76,974.41) ; v1(1584.65,501.97) 1604.33,482.28 U2.25
  Bottom Layer w10: v1(1584.65,501.97) 1584.65,551.18 1713.23,679.76 1713.23,990.98 v1@1712.6,991.61
GND: 1.1 2.1 C3.2 C4.2 C5.1 C6.1 C7.1 C8.1 C9.1 C10.1 C11.1 C12.1 C13.1 C14.2 C16.1 C17.2 C18.2 C19.1 C20.2 C21.2 C22.1 D1.2 D2.2 J1.GND1 J1.GND2 J1.GND3 J1.GND4 J2.GND1 J2.GND2 J2.GND3 J2.GND4 P1.5 P1.6 P4.1 P4.2 Q2.2 R7.1 R8.1 R11.1 R12.1 R13.1 R14.1 R15.1 R20.2 R22.1 SERIAL.2 ST-LINK.4 STM32.8 STM32.23 STM32.35 STM32.47 U2.1 U2.2 U2.5 U2.10 U2.15 U2.16 U2.19 U2.22 U2.24 U2.26 U2.27 U2.28 U3.2 U4.2 X1.2 | length 12008.7
  Top Layer w10: C22.1 383.86,305.12 440.86,362.12 2.1 599.66,440.5 C21.2 816.93,223.23 C20.2 ; P4.2 P4.1 324.8,1150.59 324.8,1305.12 C19.1 436.56,1424.75 1.1 661.87,1424.75 718.5,1368.11 C18.2 ; SERIAL.2 774.41,1396.06 C18.2 ; C17.2 944.88,1220.47 797.24,1368.11 C18.2 ; v1@1190.94,610.24 R14.1 1183.88,511 1092.52,511 1092.52,285.43 1102.36,275.59 1181.1,275.59 1190.94,285.43 1190.94,324.8 X1.2 1232.29,328.74 U2.10 1399.61,334.47 1525.42,334.47 1535.43,344.49 1535.43,442.91 1521.65,456.7 U2.5 1399.61,462.43 1356.93,462.43 1345.3,474.06 1345.3,516.1 1354.58,525.39 1354.58,527.73 1399.61,527.73 U2.2 U2.1 ; C11.1 1456.69,1289.37 1476.38,1309.06 C4.2 ; v1(1397.64,826.77) 1437.82,866.95 1437.82,875.11 1447.72,885.01 1481.47,885.01 STM32.23 ; C10.1 1653.54,659.45 1683.07,629.92 U2.28 U2.27@1702.76,539.37 ; STM32.8 v1@1614.17,1220.47 ; U2.22@1640.76,406.48 1640.76,399.78 1640.4,399.78 1628.76,388.15 1628.76,346.11 1640.4,334.47 1677.34,334.47 U2.19 ; U2.22 1683.07,411.24 1725.75,411.24 1737.38,422.88 1737.38,450.96 1688.8,450.96 U2.24 1688.8,462.43 1725.75,462.43 1737.38,474.06 1737.38,506.72 1732.28,511.81 1687.01,511.81 U2.26 U2.27 ; U2.27@1702.76,533.47 1750,533.47 1791.34,492.13 1811.02,492.13 R11.1 ; STM32.35 1735.06,819.71 1735.06,770.5 1846.75,770.5 1927.8,851.54 1927.8,871.7 2045.09,989 2125.62,989 2132.07,995.45 2132.07,1008.05 U3.2 2146.3,1022.28 2146.3,1186.15 2171.51,1211.36 2171.51,1258.59 2145.84,1284.26 v1(2145.84,1358.27) ; C3.2 1791.34,1318.9 ; STM32.47 v1(1907.48,1064.96) 1909.45,1064.96 1909.45,1188.46 1818.38,1279.53 v1(1791.34,1279.53) 1791.34,1318.9 ; R12.1 C7.1 1993.11,344.49 ; v1@1919.29,1358.27 1889.76,1358.27 ; C13.1 1992.12,1490.16 D2.2@1968.5,1466.54 ; v1(1993.11,260.83) 1993.11,344.49 ; 2027.56,118.11 ccw(c2111.22,221.46) 2214.57,137.8 ; v1(2086.61,1515.74) 2086.61,1496.07 2076.77,1486.23 D1.2 D2.2@1968.5,1466.54 ; v1@2165.35,255.91 C8.1 ; v1@2224.41,1269.68 v1@2224.41,1289.37 ; 2244.09,1309.06 C12.1 2287.4,1442.91 C6.1 ; R13.1 C9.1 C5.1 1993.11,344.49 ; v1@2559.06,1417.32 2559.06,1358.27 ; ST-LINK.4 2500,1555.12 R22.1 2559.06,1358.27 ; 2667.32,1161.42 C14.2 2647.64,1269.68 2559.06,1358.27 ; Q2.2 2773.62,494.09 R8.1 ; R15.1 v1(2903.55,1250) ; 3325.2,451.18 J1.GND1 ; 1791.34,1318.9 1870.08,1318.9 1889.76,1338.58 1889.76,1358.27 ; 1889.76,1358.27 1889.76,1407.48 1948.82,1466.54 D2.2@1968.5,1466.54
  Top Layer w20: 2667.32,1161.42 2706.69,1200.79 2874.02,1200.79 R15.1
  Bottom Layer w10: C21.2 767.97,423.23 802.59,388.61 890.58,388.61 1122.05,620.08 v1(1200.79,620.08) 1181.1,639.76 1053.15,639.76 P1.6 ; SERIAL.2 844.46,1703.91 1878.76,1703.91 2066.93,1515.74 v1(2086.61,1515.74) ; v1(1929.13,1358.27) v1(2145.84,1358.27) 2204.72,1358.27 2234.25,1328.74 v1@2234.25,1269.68
  other v1: 2175.2,265.75 1614.17,1240.16 2239.25,1269.68 2559.06,1427.17
LOAD: STM32.11 U2.8 | length 998.6
  Top Layer w10: v1(1289.37,659.45) 1289.37,639.76 1318.9,610.24 1318.9,534.95 1313.3,529.36 1313.3,418.99 1352.36,379.92 U2.8 ; STM32.11 1555.12,1072.83 1564.96,1072.83 v1(1614.17,1023.62)
  Bottom Layer w10: v1(1289.37,659.45) 1574.8,944.88 1614.17,984.25 v1(1614.17,1023.62)
NetC1_1: C1.1 R4.1 | length 153.2
  Top Layer w10: R4.1 3120.08,511.81 3149.61,541.34 C1.1 3182.09,539.37 C1.1@3169.37,526.65
NetC2_1: C2.1 R5.1 | length 241.4
  Top Layer w10: R5.1 2513.29,371.01 2500.75,383.55 2500.75,439.28 2506.97,445.5 2506.97,528.62 C2.1
NetC3_1: C3.1 R10.2 STM32.3 Y1.2 | length 659.7
  Top Layer w10: R10.2 1788.39,1407.48 C3.1 ; STM32.3 1712.6,1338.58 1778.54,1404.53 C3.1 ; Y1.2 1811.02,1424.21 C3.1
NetC4_1: C4.1 R10.1 STM32.4 Y1.1 | length 655.2
  Top Layer w10: Y1.1 1437.01,1446.85 C4.1 R10.1 1647.64,1358.27 1663.39,1358.27 1692.91,1328.74 STM32.4
NetC5_2: C5.2 L1.2 L2.1 | length 242.5
  Top Layer w10: L1.2 2032.56,541.26 2032.56,410.36 2045.28,397.64 C5.2
  Top Layer w25: L1.2 L2.1
NetC7_2: C7.2 L1.1 R11.2 U2.21 | length 629.7
  Top Layer w10: U2.21 1758.32,379.92 1805.8,427.4 1907.24,427.4 1937.01,397.64 C7.2 1945.95,404.61 1945.95,523.7 L1.1 1963.58,545.28 1945.95,562.91 1897.68,562.91 1885.56,575.04 1837.29,575.04 1828.5,566.25 1828.5,562.76 1809.06,543.31 R11.2
NetC8_2: C8.2 L2.2 L3.1 | length 269.8
  Top Layer w10: C8.2 2175.2,403.54 L2.2
  Top Layer w25: L2.2 L3.1
NetC14_1: C14.1 U4.1 | length 268.4
  Top Layer w20: U4.1 2385.83,1125.99 2421.26,1161.42 C14.1
NetC15_1: C15.1 U4.8 | length 226.3
  Top Layer w10: C15.1@2765.75,1159.45 C15.1
  Top Layer w20: U4.8 2685.24,1078.94 C15.1@2765.75,1159.45
NetD1_1: D1.1 R2.1 | length 216.1
  Top Layer w10: D1.1@2066.02,1396.73 D1.1 2076.77,1250 2086.61,1240.16 R2.1
NetD2_1: D2.1 R3.1 | length 243.2
  Top Layer w10: R3.1 1996.06,1238.19 1996.06,1340.55 1988.19,1348.43 1988.19,1377.95 1968.5,1397.64 1968.5,1407.48 1979.25,1396.73
NetP1_3: P1.3 R16.1 | length 506.3
  Top Layer w10: P1.3 885.83,807.09 1181.1,807.09 R16.1
NetP1_4: P1.4 R17.2 | length 409.1
  Top Layer w10: P1.4 1090.94,1013.78 R17.2
NetP4_2: P4.4 R23.1 | length 221.9
  Top Layer w10: P4.4 614.17,980.31 R23.1
NetP4_3: P4.3 pad.3 R24.1 R25.1 | length 613.7
  Top Layer w10: P4.3 470.47,1011.81 pad.3@492.13,1033.46 ; R24.1 541.34,767.72 v1(541.34,826.77) 610.24,826.77 R25.1
  Bottom Layer w10: pad.3 531.5,1043.31 541.34,1033.46 v1(541.34,826.77)
NetQ1_1: Q1.1 Q2.3 R1.1 | length 394.2
  Top Layer w10: Q2.3 2736.22,716.54 2746.97,705.79 2802.09,705.79 Q1.1@2875.98,631.89 ; Q1.1 Q1.1@2875.98,631.89 ; R1.1 3059.13,655.44 2985.55,655.44 2978.35,662.64 2906.73,662.64 Q1.1@2875.98,631.89
NetQ1_2: Q1.2 R4.2 R6.1 R8.2 | length 422.5
  Top Layer w10: R8.2 2846.46,492.13 R4.2@2950.79,492.13 ; Q1.2 R4.2@2950.79,492.13 ; R6.1 2960.71,346.38 2960.71,482.21 R4.2@2950.79,492.13
NetQ2_1: Q2.1 R5.2 R6.2 R7.2 | length 698.8
  Top Layer w10: R5.2 2541.34,411.42 2572.83,379.93 2698.82,379.93 ; Q2.1 2698.82,379.93 ; R6.2 2921.26,332.68 2909.53,320.94 2818.54,320.94 2808.38,310.79 2762.49,310.79 2753.7,319.57 2753.7,323.07 2734.25,342.52 R7.2 2734.25,346.46 2707.86,372.85 2705.89,372.85 2698.82,379.93
NetR2_2: R2.2 STM32.39 | length 626.8
  Top Layer w10: STM32.39 1803.78,908.11 1941.57,908.11 2066.3,1032.83 2066.3,1128.77 2155.51,1217.99 2155.51,1251.97 R2.2
NetR3_2: R3.2 STM32.41 | length 624
  Top Layer w10: STM32.41 1940.94,946.85 2027.56,1033.46 2027.56,1141.73 1958.84,1210.46 1925.56,1210.46 1919.12,1216.9 1919.12,1250.17 1909.45,1259.84 1909.45,1289.37 R3.2
NetR9_2: R9.2 STM32.7 | length 205.8
  Top Layer w10: STM32.7 1633.86,1181.1 1673.23,1220.47 1673.23,1269.69 R9.2
NetR12_2: R12.2 U2.20 | length 164.8
  Top Layer w10: U2.20 1761.01,354.33 1790.61,383.94 1818.98,383.94 R12.2
NetR14_2: R14.2 U2.12 | length 401.2
  Top Layer w10: 1210.63,456.69 v1(1265.75,456.69) ; v1(1309.06,236.22) 1350.4,277.56 U2.12
  Bottom Layer w10: v1(1265.75,456.69) 1289.37,433.07 1289.37,413.39 1299.21,403.54 1299.21,246.06 v1(1309.06,236.22)
NetR18_2: R18.2 R20.1 U3.4 | length 448.8
  Top Layer w10: v1@2027.56,748.03 R18.2 2027.56,837.6 2108.27,918.31 U3.4 ; v1@2214.57,748.03 R20.1
  Bottom Layer w10: v1(2027.56,738.19) v1(2214.57,738.19)
NetR19_2: R19.2 U4.6 U4.7 | length 502.8
  Top Layer w10: R19.2 2627.95,797.24 2687.01,856.3 2687.01,994.09 2657.48,1023.62 2580.12,1023.62 U4.7 U4.6 U4.6@2579.33,974.41
NetU2_9: U2.9 X1.3 | length 315.2
  Top Layer w10: X1.3 1141.73,374.02 1309.05,374.02 1328.74,354.33 U2.9
PA11: R23.2 STM32.32 | length 1309.4
  Top Layer w10: R23.2 728.35,1023.62 v1(748.03,1023.62) ; v1(1309.06,767.72) 1466.54,767.72 1476.38,757.87 1673.23,757.87 STM32.32
  Bottom Layer w10: v1(748.03,1023.62) 790.51,981.14 790.51,922.13 799.3,913.35 966.57,913.35 1003.94,875.98 1003.94,767.72 1013.78,757.87 1318.9,757.87 v1@1328.74,767.72
PA12: R24.2 STM32.33 | length 1114.3
  Top Layer w10: R24.2 728.35,639.76 1112.2,639.76 1184.61,712.17 1666.89,712.17 1692.91,738.19 1692.91,777.52
POWER: 1.3 2.3 C17.1 C20.1 P4.5 SERIAL.1 | length 2881.9
  Top Layer w10: v1(295.28,1023.62) 295.28,964.57 305.93,953.91 400.59,953.91 P4.5 458.66,948.82 492.13,915.35 492.13,673.76 2.3 346.91,622.5 324.8,600.39 324.8,492.13 233.07,400.39 233.07,278.74 272.44,239.37 587.4,239.37 616.93,209.84 C20.1 ; 1.3 647.3,1606.75 SERIAL.1
  Bottom Layer w10: v1(295.28,1023.62) 295.28,1043.31 374.02,1122.05 705.51,1122.05 C17.1 561.02,1345.27 561.02,1520.47 SERIAL.1
RF: C2.2 C9.2 L3.2 R13.2 | length 349.2
  Top Layer w10: C9.2 2265.74,395.67 R13.2 L3.2 C2.2
SERIAL-1: SERIAL.3 STM32.12 | length 922.7
  Top Layer w10: STM32.12 v1@1535.43,1220.47
  Bottom Layer w10: SERIAL.3 924.04,1633.86 924.04,1593.31 1277.19,1240.16 v1(1525.59,1240.16)
SERIAL-2: SERIAL.4 STM32.13 | length 927.6
  Top Layer w10: SERIAL.4 1102.36,1505.91 1102.36,1181.1 1141.73,1141.73 1417.32,1141.73 1474.41,1084.64 STM32.13
SMA_INPUT: C15.2 J2.P R15.2 | length 667.2
  Top Layer w10: C15.2@2820.87,1159.45 C15.2 ; 2962.6,1151.58 R15.2 R15.2@2962.6,1175.19 ; J2.P@3395.36,1202.05 J2.P J2.P@3415.36,1222.05
  Top Layer w20: C15.2@2820.87,1159.45 2836.61,1159.45 2874.02,1122.05 2933.07,1122.05 2962.6,1151.58 ; R15.2@2962.6,1175.19 2989.45,1202.05
  Top Layer w25: 2989.45,1202.05 J2.P@3395.36,1202.05
SMA_OUTPUT: C1.2 J1.P | length 182.9
  Top Layer w10: C1.2 3245.08,551.18 J1.P
SWDCLOCK: R21.1 ST-LINK.3 STM32.37 | length 1696.6
  Top Layer w10: STM32.37 v1(1887.8,868.11) ; v1(2677.17,1348.43) 2736.22,1348.43 R21.1
  Bottom Layer w10: v1(1887.8,868.11) 2243.58,868.11 2312.99,937.53 2312.99,1151.57 2460.63,1299.21 2677.17,1299.21 v1(2677.17,1348.43) 2677.17,1514.17 2527.95,1663.39 ST-LINK.3
SWDIO: R22.2 ST-LINK.2 STM32.34 | length 1634
  Top Layer w10: STM32.34 1712.6,748.03 1722.44,748.03 1748.28,722.19 1785.18,722.19 v1(1791.34,728.34) ; ST-LINK.2 2440.95,1670.08 R22.2 2440.95,1240.16 v1@2460.63,1220.47
  Bottom Layer w10: v1@1781.5,728.34 v1(1791.34,728.34) 1791.34,748.22 1871.23,828.11 2226.2,828.11 2329.62,931.53 2329.62,1099.31 v1(2460.63,1230.32)
VMag: STM32.16 U3.3 U4.4 | length 1395.6
  Top Layer w10: 1397.64,1033.46 1405.51,1025.59 ; U3.3@2100.48,1038.31 2108.27,1030.51 U3.3 2116.14,1029.53 2106.3,1039.37 v1(2106.3,1112.2)
  Top Layer w20: 1397.64,1033.46 v1(1397.64,1082.68) ; 1405.51,1025.59 1444.85,1025.59 ; v1(2273.62,954.72) 2299.41,928.94 U4.4
  Bottom Layer w10: v1(1397.64,1082.68) v1@1397.64,1102.36 ; v1@2096.46,1112.2 v1(2106.3,1112.2) v1@2116.14,1122.05 ; v1@2263.78,964.57 v1(2273.62,954.72)
  Bottom Layer w20: v1@1397.64,1102.36 1437.01,1141.73 2066.93,1141.73 v1@2096.46,1112.2 ; v1@2116.14,1122.05 2204.72,1122.05 2263.78,1062.99 v1@2263.78,964.57
pads on no net: 1.4 2.4 P4.M P4.S R5.3 STM32.1 STM32.2 STM32.5 STM32.6 STM32.14 STM32.17 STM32.18 STM32.19 STM32.21 STM32.22 STM32.25 STM32.26 STM32.27 STM32.28 STM32.29 STM32.30 STM32.31 STM32.38 STM32.40 STM32.42 STM32.43 STM32.45 STM32.46 U2.13 U2.14 U2.17 U4.3 U4.5

## Polygon pours and split planes (outlines as drawn)
GND on Bottom Layer "Top Layer-No Net" (solid, remove dead copper, pour order 20): 0,1830.71 0,0 3513.78,0 3513.78,1820.87 3503.94,1830.71
GND on Top Layer "Top Layer-No Net" (solid, remove dead copper, pour order 22): 0,1830.71 0,0 3513.78,0 3513.78,1811.02 3494.09,1830.71

## Silkscreen, mask and mechanical layers (free items; w line width, h text height)
Top Overlay:
  text "+" at 659.45,1761.81 h40
  text "-" at 757.87,1761.81 h40
  text "3.3V" at 334.65,1456.69 h40 r90
  text "3.3V" at 2352.36,1456.69 h20 r90
  text "SWDIO" at 2440.94,1456.69 h20 r90
  text "CLOCK" at 2519.68,1456.69 h20 r90
  text "GND" at 2627.95,1456.69 h20 r90
  text "+" at 1043.31,1299.21 h40
  text "INPUT" at 3307.09,1161.42 h30 r90
  text "3.3V" at 2066.93,1122.05 h20 r90
  text "LOG AMP" at 2431.1,1122.05 h20
  text "+" at 610.24,1102.36 h40
  text "USB" at 147.64,1082.68 h60 r270
  text "AMPLIFER" at 2824.8,807.09 h25
  text "FILTER" at 2116.14,649.61 h25
  text "5V" at 354.33,501.97 h40 r90
  text "OUTPUT" at 3316.93,452.76 h30 r90
  text "+" at 915.35,364.17 h40
  text "AD9851" at 1673.23,157.48 h30
  text "+" at 501.97,108.27 h40
  text "TEENY v1" at 2224.41,108.27 h38
  text "o" at 2864.17,-49.21 h400
Mechanical 1:
  lines w25: -9.84,-9.84 -9.84,467.03 -9.84,1369.59 -9.84,1840.55 3513.78,1840.55 3513.78,-9.84 -9.84,-9.84

## Text inside footprints (layer, text, board x,y; h text height)
P1: Top Overlay "6" at 915.04,697.87 h50 r270; Top Overlay "5" at 815.04,697.87 h50 r270; Top Overlay "2" at 915.04,1057.87 h50 r270; Top Overlay "1" at 815.04,1037.87 h50 r270